# Allegro board 8MICS_V021.brd
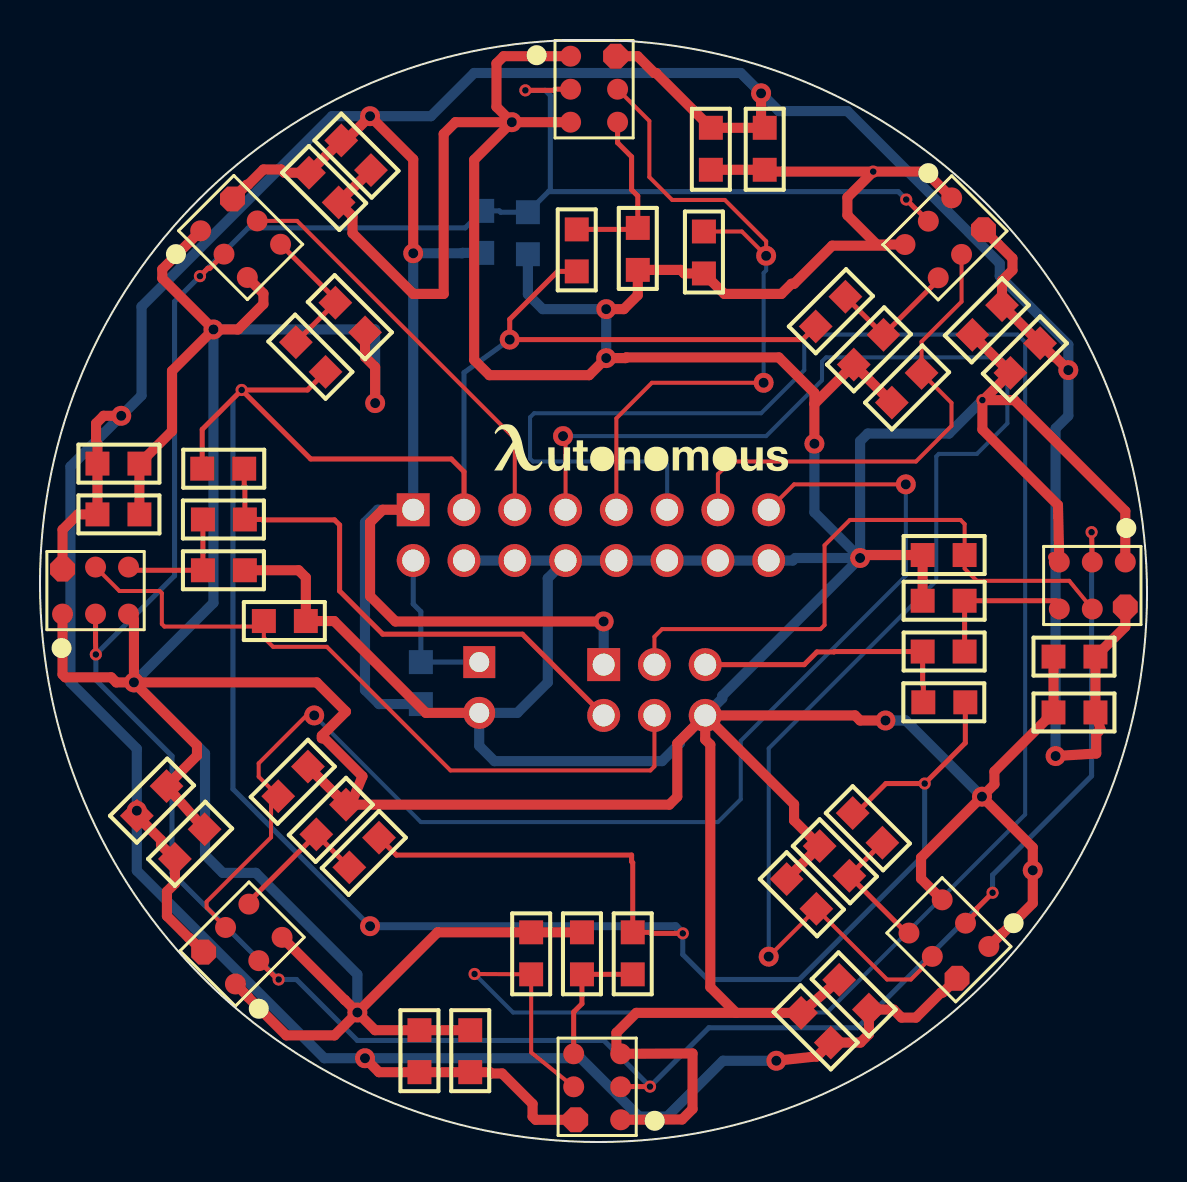
[diagram p0: board, top side]
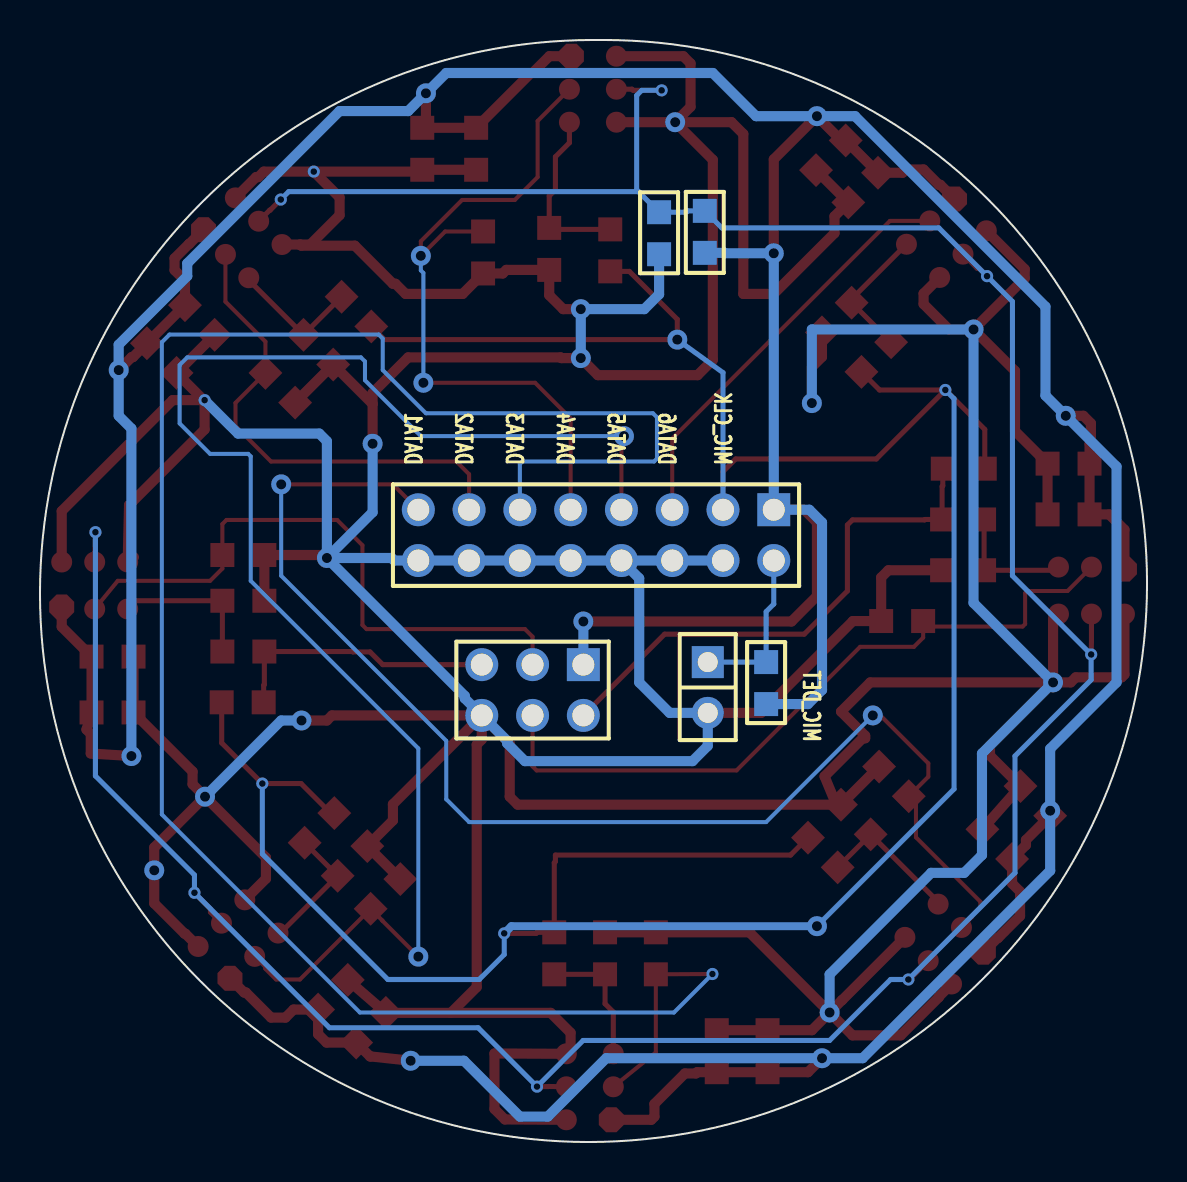
[diagram p1: board, bottom side, seen from below]

Outline 55.37 x 55.12 mm; copper layers: TOP, BOTTOM. Coordinates in mm from the lower left corner of the outline.
Outline path: 0,27.94 arc(7.96,47.16) 27.18,55.12 27.69,55.12 arc(47.26,47.01) 55.37,27.43 arc(47.34,8.03) 27.94,0 arc(8.18,8.18) 0,27.94

## Design rules (mm)
nets with their own width: min track width 0.203; nets MIC_DATA1 MIC_DATA2 MIC_DATA3 MIC_DATA4 MIC_DATA5 MIC_DATA6 MIC_DATA7 MIC_DATA8
nets with their own width: min track width 0.254; nets ARRAY_DET LR_SELECT MIC_CK MIC_CK7 MIC_CK8 MIC_CLK1 MIC_CLK2 MIC_CLK3 MIC_CLK4 MIC_CLK5 MIC_CLK6 MIC_CLK7 MIC_CLK8
nets with their own width: min track width 0.508; nets 3.3V GND

## Placement (name value [footprint] x y rotation side)
C1  10uF  [CAP_SMD_0805]  14.94 46.99 135 top
C2  100nF  [CAP_SMD_0805]  16.56 48.61 135 top
C4  15pF  [CAP_SMD_0805]  14.77 41.98 315 top
C5  15pF  [CAP_SMD_0805]  38.83 11.67 135 top
C6  15pF  [CAP_SMD_0805]  40.48 13.32 135 top
C7  10uF  [CAP_SMD_0805]  39.98 8.11 315 top
C8  100nF  [CAP_SMD_0805]  38.07 6.46 315 top
C9  15pF  [CAP_SMD_0805]  33.21 45.54 270 top
C10  15pF  [CAP_SMD_0805]  29.9 45.72 270 top
C11  10uF  [CAP_SMD_0805]  36.25 48.63 90 top
C12  100nF  [CAP_SMD_0805]  33.56 48.63 90 top
C13  15pF  [CAP_SMD_0805]  24.57 8.39 90 top
C14  15pF  [CAP_SMD_0805]  27.11 8.39 90 top
C15  10uF  [CAP_SMD_0805]  21.52 5.59 270 top
C16  100nF  [CAP_SMD_0805]  18.98 5.59 270 top
C17  15pF  [CAP_SMD_0805]  44.09 38.47 225 top
C18  15pF  [CAP_SMD_0805]  42.19 40.37 225 top
C19  10uF  [CAP_SMD_0805]  46.63 40.37 45 top
C20  100nF  [CAP_SMD_0805]  48.54 38.47 45 top
C21  15pF  [CAP_SMD_0805]  11.92 17.29 45 top
C22  15pF  [CAP_SMD_0805]  13.82 15.39 45 top
C23  10uF  [CAP_SMD_0805]  8.23 15.64 225 top
C24  100nF  [CAP_SMD_0805]  6.33 17.8 225 top
C25  15pF  [CAP_SMD_0805]  46.25 29.36 180 top
C26  15pF  [CAP_SMD_0805]  46.25 27.07 180 top
C27  10uF  [CAP_SMD_0805]  50.69 24.28 0 top
C28  100nF  [CAP_SMD_0805]  50.69 21.48 0 top
C29  15pF  [CAP_SMD_0805]  11.2 26.06 0 top
C30  15pF  [CAP_SMD_0805]  8.15 28.6 0 top
C31  10uF  [CAP_SMD_0805]  4.97 31.39 180 top
C32  100nF  [CAP_SMD_0805]  4.97 33.93 180 top
J1  IDC_16_2.54mm  [16PINDUALMALEHEADER]  18.67 31.62 0 bottom
J2  JUMPER1  [J1_2_254]  21.97 24 270 bottom
J3  ICD_6_2.54mm  [6PINDUALMALEHEADER]  28.19 23.88 0 bottom
NOREF  -  []  17.42 33.55 0 top
R1  100  [RES_SMD_0805]  12.8 40 315 top
R2  0  [RES_SMD_0805]  24.41 46.5 270 bottom
R3  10K  [RES_SMD_0805]  22.12 44.47 90 bottom
R4  100  [RES_SMD_0805]  42.14 14.97 135 top
R5  100  [RES_SMD_0805]  26.85 45.65 270 top
R6  100  [RES_SMD_0805]  29.65 8.39 90 top
R7  100  [RES_SMD_0805]  40.28 42.28 225 top
R8  100  [RES_SMD_0805]  15.47 13.74 45 top
R9  100  [RES_SMD_0805]  46.25 24.53 180 top
R10  100  [RES_SMD_0805]  8.15 31.14 0 top
R11  10K  [RES_SMD_0805]  19.05 24 270 bottom
R12  0  [RES_SMD_0805]  44.18 21.99 0 top
R13  0  [RES_SMD_0805]  10.22 33.68 180 top
U1  Micophone MP45DT02  [MP45DT02]  10.87 46.07 45 top
U2  Micophone MP45DT02  [MP45DT02]  44.63 9.28 225 top
U3  Micophone MP45DT02  [MP45DT02]  28.89 52.66 0 top
U4  Micophone MP45DT02  [MP45DT02]  26.7 2.76 180 top
U5  Micophone MP45DT02  [MP45DT02]  46.1 44.39 315 top
U6  Micophone MP45DT02  [MP45DT02]  9.28 10.73 135 top
U7  Micophone MP45DT02  [MP45DT02]  52.64 26.66 270 top
U8  Micophone MP45DT02  [MP45DT02]  2.78 28.76 90 top

## Library data of the parts
C1 C2 C4-C32 = CAPACITOR NON-POL
J1 = CON16AP_1
J2 = JUMPER1
J3 = CON6
R1-R13 = R
U1-U8 = Micophone MP45DT02_0

## Footprints (pads in the part's own frame, mm; a bottom-side part is the same pattern mirrored in y, then rotated)
6PINDUALMALEHEADER
  rect 1.65x1.65 hole 1.1: 1(0,0)
  round 1.65 hole 1.1: 2(0,2.54) 3(2.54,0) 4(2.54,2.54) 5(5.08,0) 6(5.08,2.54)
16PINDUALMALEHEADER
  rect 1.65x1.65 hole 1.1: 1(0,0)
  round 1.65 hole 1.1: 2(0,2.54) 3(2.54,0) 4(2.54,2.54) 5(5.08,0) 6(5.08,2.54) 7(7.62,0) 8(7.62,2.54) 9(10.16,0) 10(10.16,2.54) 11(12.7,0) 12(12.7,2.54) 13(15.24,0) 14(15.24,2.54) 15(17.78,0) 16(17.78,2.54)
CAP_SMD_0805
  rect 1.2x1.2 smd: 1(0,0) 2(2.1,0)
J1_2_254
  rect 1.6x1.6 hole 1: 1(0,0)
  round 1.6 hole 1: 2(2.54,0)
MP45DT02
  round 1.05 smd: 1(-2.35,1.65) 2(-2.35,0) 3(-2.35,-1.65) 4(0,-1.65) 5(0,0)
  rrect 1.25x1.25 smd: 6(-0.1,1.65)
RES_SMD_0805
  rect 1.2x1.2 smd: 1(0,0) 2(2.1,0)

## Nets
3.3V: C1.2 C2.2 C7.2 C8.2 C11.2 C12.2 C15.2 C16.2 C19.2 C20.2 C23.2 C24.2 C27.2 C28.2 C31.2 C32.2 J1.1 J3.1 R3.1 R11.2 U1.6(3V3) U2.6(3V3) U3.6(3V3) U4.6(3V3) U5.6(3V3) U6.6(3V3) U7.6(3V3) U8.6(3V3)
GND: C1.1 C2.1 C4.2 C5.2 C6.2 C7.1 C8.1 C9.2 C10.2 C11.1 C12.1 C13.2 C14.2 C15.1 C16.1 C17.2 C18.2 C19.1 C20.1 C21.2 C22.2 C23.1 C24.1 C25.2 C26.2 C27.1 C28.1 C29.2 C30.2 C31.1 C32.1 J1.4 J1.6 J1.8 J1.10 J1.12 J1.14 J1.16 J2.2 J3.6 R2.2 U1.1(GND) U1.3(GND1) U2.1(GND) U2.3(GND1) U3.1(GND) U3.3(GND1) U4.1(GND) U4.3(GND1) U5.1(GND) U5.3(GND1) U6.1(GND) U6.3(GND1) U7.1(GND) U7.3(GND1) U8.1(GND) U8.3(GND1)
ARRAY_DET: J1.2 J2.1 R11.1
LR_SELECT: R2.1 R3.2 U1.2(LR) U2.2(LR) U3.2(LR) U4.2(LR) U5.2(LR) U6.2(LR) U7.2(LR) U8.2(LR)
MIC_CK: J1.3 R1.2 R4.2 R5.2 R6.2 R7.2 R8.2 R12.2 R13.2
MIC_CK7: J3.5 R9.2 R12.1
MIC_CK8: J3.2 R10.2 R13.1
MIC_CLK1: C4.1 R1.1 U1.4(CLK)
MIC_CLK2: C6.1 R4.1 U2.4(CLK)
MIC_CLK3: C10.1 R5.1 U3.4(CLK)
MIC_CLK4: C14.1 R6.1 U4.4(CLK)
MIC_CLK5: C18.1 R7.1 U5.4(CLK)
MIC_CLK6: C22.1 R8.1 U6.4(CLK)
MIC_CLK7: C26.1 R9.1 U7.4(CLK)
MIC_CLK8: C30.1 R10.1 U8.4(CLK)
MIC_DATA1: J1.5 U1.5(DOUT)
MIC_DATA2: C5.1 J1.7 U2.5(DOUT)
MIC_DATA3: C9.1 J1.9 U3.5(DOUT)
MIC_DATA4: C13.1 J1.11 U4.5(DOUT)
MIC_DATA5: C17.1 J1.13 U5.5(DOUT)
MIC_DATA6: C21.1 J1.15 U6.5(DOUT)
MIC_DATA7: C25.1 J3.3 U7.5(DOUT)
MIC_DATA8: C29.1 J3.4 U8.5(DOUT)

## Via types
v1: diameter 1, hole 0.5, TOP to BOTTOM, 30 vias
v2: diameter 0.61, hole 0.33, TOP to BOTTOM, 14 vias

## Routing (per net, layer and track width the routed paths; a pad name or vN(x,y) marks a point on that pad's centre or on a via; arc(x,y) is an arc through that point)
3.3V: length 287.3
  TOP w0.508: v1(36.83,4.06) 38.82,4.28 38.86,4.28 C8.2 41.04,4.97 41.46,5.4 C7.2 42.69,6.62 43.09,6.22 43.82,6.22 45.07,7.48 45.16,7.48 U2.6 ; J1.1 17.15,31.62 16.51,30.99 16.51,27.3 17.78,26.03 v1(28.19,26.03) ; U1.6 10.34,47.88 10.41,47.88 11.18,48.64 12.06,48.64 12.22,48.48 C1.2 C2.2 15.3,50.09 v1(16.51,51.31) 18.67,49.15 v1(18.67,44.45) ; U4.6 24.8,1.11 24.64,1.27 24.64,1.91 23.11,3.43 22.56,3.43 22.5,3.49 C15.2 C16.2 16.95,3.49 v1(16.26,4.19) ; v1(4.06,36.32) 3.18,36.32 2.81,35.95 2.81,34.98 2.87,34.91 C32.2 C31.2 1.89,31.39 1.13,30.63 U8.6 ; U6.6 7.47,10.21 7.45,10.21 6.35,11.3 6.35,12.53 6.75,12.93 C23.2 6.06,14.85 6.06,15.1 C24.2 ; U3.6 29.89,54.31 30.73,53.47 30.82,53.47 C12.2 C11.2 36.07,50.91 v1(36.07,52.45) ; v1(51.44,38.61) 50.79,39.26 50.72,39.26 C20.2 C19.2 48.12,43.09 48.64,43.61 48.64,44.2 47.92,44.92 47.9,44.92 U5.6 ; U7.6 54.29,25.77 C27.2 C28.2 53.05,20.63 52.83,20.41 52.83,19.43 v1(50.8,19.3)
  BOTTOM w0.508: v1(36.83,4.06) 34.16,4.06 31.37,1.27 29.97,1.27 27.05,4.19 v1(16.26,4.19) 14.22,4.19 4.84,13.57 v1(4.84,16.57) 4.84,19.67 1.52,22.99 1.52,33.78 v1(4.06,36.32) 5.08,37.34 5.08,41.78 14.61,51.31 v1(16.51,51.31) 19.56,51.31 21.72,53.47 35.05,53.47 v1(36.07,52.45) 36.96,51.56 40.39,51.56 48.01,43.94 48.01,43.31 51.44,39.88 v1(51.44,38.61) 51.44,36.32 50.8,35.69 v1(50.8,19.3) ; v1(28.19,26.03) J3.1 ; R3.1 21.14,44.47 21.12,44.45 v1(18.67,44.45) J1.1 16.89,31.62 16.26,30.99 16.26,22.61 16.96,21.9 R11.2
GND: length 502.5
  TOP w0.508: 34.82,6.46 29.83,6.46 28.83,5.46 28.83,4.62 U4.3 32.64,4.43 32.64,1.65 32.12,1.13 U4.1 ; 34.82,6.46 C8.1 C7.1 ; 34.82,6.46 33.53,7.75 33.53,19.88 33.27,20.13 J3.6 ; v1(15.88,6.48) 14.73,5.33 12.32,5.33 10.42,7.24 10.42,7.26 U6.1 ; v1(15.88,6.48) 16.76,5.59 C16.1 C15.1 ; v1(15.88,6.48) 19.88,10.49 C13.2 C14.2 ; v1(15.88,6.48) 15.25,7.1 15.25,7.1 U6.3 ; C19.1 C20.1 47.18,37.11 ; 10.37,43.24 11.18,42.44 11.18,41.91 9.91,40.64 v1(8.68,40.64) ; C22.2 15.59,16.99 16.13,18.29 14.22,20.19 14.1,20.19 14.1,20.32 15.3,21.53 13.84,22.99 v1(4.7,22.99) ; C22.2 31.48,16.87 31.88,17.27 31.88,19.94 J3.6 ; C22.2 C21.2 ; U1.1 6.12,43.65 6.12,43.2 v1(8.68,40.64) ; v2(41.68,48.54) 40.39,47.24 40.39,46.35 41.85,44.89 42.36,44.89 ; v2(41.68,48.54) 36.34,48.54 C11.1 C12.1 ; v2(41.68,48.54) 44.17,48.54 44.45,48.26 44.56,48.26 U5.1 ; 47.18,37.11 48.74,37.11 54.29,31.55 U7.1 ; 47.18,37.11 v2(47.14,37.11) 47.14,35.64 50.92,31.86 U7.3 50.67,29.25 ; v1(23.6,51.01) 22.83,51.77 22.83,53.95 23.19,54.31 U3.1 ; v1(23.6,51.01) 21.72,49.12 21.72,39.12 22.48,38.35 27.47,38.35 v1(28.32,39.21) 29.29,39.21 29.33,39.24 36.96,39.24 38.74,37.46 38.74,36.92 ; v1(23.6,51.01) 20.78,51.01 20.19,50.42 20.19,42.42 18.67,42.42 15.63,45.45 15.63,46.3 C1.1 C2.1 ; v1(23.6,51.01) U3.3 ; C27.1 C28.1 47.74,18.53 47.74,17.89 v1(47.12,17.27) ; v1(47.12,17.27) 49.66,14.73 v1(49.66,13.59) 49.66,11.94 48.14,10.42 48.1,10.42 U2.1 ; v1(47.12,17.27) 44.07,14.22 44.07,13.17 U2.3 ; v1(41.02,29.21) 41.17,29.36 C25.2 C26.2 ; J3.6 37.72,16.89 37.72,16.08 C6.2 C5.2 ; J3.6 40.77,21.34 41.02,21.08 v1(42.29,21.08) ; 42.36,44.89 U5.3 ; 42.36,44.89 42.3,44.83 39.62,44.83 37.72,42.93 37.59,42.93 37.08,42.42 34.23,42.42 C9.2 32.23,43.44 32.05,43.62 C10.2 29.9,42.36 29.2,41.66 v1(28.32,41.66) ; v1(16.76,36.96) 16.76,38.76 16.26,39.26 C4.2 ; C17.2 C18.2 38.74,36.92 ; v1(4.7,22.99) 7.85,19.83 7.85,19.33 C24.1 C23.1 ; v1(4.7,22.99) 4.7,26.13 U8.3 ; v1(4.7,22.99) 3.82,22.99 3.56,23.24 1.27,23.24 1.13,23.38 U8.1 ; v1(8.68,40.64) 6.6,38.57 6.6,35.56 C32.1 C31.1 ; 38.74,36.92 v1(38.74,34.92) ; J2.2 19.3,21.46 14.71,26.06 C29.2 13.3,28.24 12.94,28.6 C30.2
  BOTTOM w0.508: J1.8 J1.10 J1.12 J1.14 J1.16 37.66,29.08 37.78,29.21 v1(41.02,29.21) ; J1.8 25.4,28.19 25.4,22.99 23.88,21.46 J2.2 21.97,19.81 22.73,19.05 31.12,19.05 32,19.94 32,20.07 J3.6 34.13,22.19 34.13,22.32 v1(41.02,29.21) ; J1.8 J1.6 J1.4 ; v1(15.88,6.48) 15.88,8.38 10.8,13.46 9.14,13.46 8.26,14.35 8.26,19.43 v1(4.7,22.99) ; v1(47.12,17.27) 43.31,21.08 v1(42.29,21.08) ; v1(4.7,22.99) 8.68,26.96 v1(8.68,40.64) 16.76,40.64 v1(16.76,36.96) ; v1(4.7,22.99) 4.57,22.99 ; v1(41.02,29.21) 38.74,31.5 v1(38.74,34.92) ; v1(41.02,29.21) 41.02,35.05 41.4,35.43 45.47,35.43 v2(47.14,37.11) ; v1(28.32,39.21) v1(28.32,41.66) 25.15,41.66 24.41,42.4 R2.2
ARRAY_DET: length 8.2
  BOTTOM w0.254: J2.1 R11.1 19.05,26.53 18.67,26.91 J1.2
LR_SELECT: length 160.6
  TOP w0.254: v2(8,43.31) 8.4,43.7 8.5,43.7 U1.2 ; U4.2 29.95,2.78 29.95,2.77 v2(30.51,2.77) ; v2(11.94,8.13) 11.88,8.13 U6.2 ; U2.2 46.85,11.5 46.85,11.67 v2(47.65,12.47) ; v2(2.79,24.38) 2.78,25.03 U8.2 ; v2(24.28,52.6) 25.7,52.6 25.76,52.66 U3.2 ; U5.2 43.88,46.61 43.86,46.61 v2(43.33,47.14) ; U7.2 v2(52.6,30.5)
  BOTTOM w0.254: v2(52.6,30.5) 52.6,18.31 47.65,13.36 v2(47.65,12.47) 40.89,5.71 33.46,5.71 v2(30.51,2.77) 28.2,5.08 15.88,5.08 12.83,8.13 v2(11.94,8.13) 6.6,13.46 6.6,19.3 2.79,23.11 v2(2.79,24.38) 6.73,28.32 6.73,42.04 v2(8,43.31) 10.41,45.72 21.27,45.72 R3.2 22.97,46.57 23.04,46.5 R2.1 25.44,47.53 ; 25.44,47.53 42.93,47.53 v2(43.33,47.14) ; 25.44,47.53 25.53,47.62 25.53,52.34 25.27,52.6 v2(24.28,52.6)
MIC_CK: length 149.2
  TOP w0.254: v2(10.09,37.61) 13.38,37.61 R1.2 ; v2(10.09,37.61) 8.12,35.64 R13.2 8.26,33.82 8.26,34.09 8.33,34.16 ; v2(10.09,37.61) 13.54,34.16 20.57,34.16 21.21,33.53 J1.3 ; R4.2 40.84,16.45 42.31,17.93 v2(44.25,17.93) 46.28,19.96 R12.2 ; R7.2 38.14,40.13 v1(23.5,40.13) 23.5,41.15 25.89,43.55 R5.2 ; v2(32.15,10.44) 30.55,10.44 30.5,10.49 R6.2 29.65,13.97 29.59,14.03 29.59,14.35 17.83,14.35 R8.2
  BOTTOM w0.254: J1.3 21.21,38.48 v1(23.5,40.13) ; v2(44.25,17.93) 44.25,14.41 37.97,8.13 33.4,8.13 32.15,9.38 v2(32.15,10.44) ; v1(16.51,10.79) 9.65,17.65 9.65,37.18 v2(10.09,37.61)
  BOTTOM w0.4: v1(16.51,10.79) 31.79,10.79 v2(32.15,10.44)
MIC_CK7: length 13.7
  TOP w0.254: J3.5 38.23,23.88 38.86,24.51 39.72,24.51 39.74,24.53 R9.2 44.15,22.88 44.18,22.85 R12.1
MIC_CK8: length 26.5
  TOP w0.254: R13.1 10.22,32.82 10.25,32.79 R10.2 11.1,31.14 11.12,31.12 14.73,31.12 14.99,30.86 14.99,27.56 17.15,25.4 24.13,25.4 J3.2
MIC_CLK1: length 6.9
  TOP w0.254: R1.1 C4.1 14.77,42.16 U1.4
MIC_CLK2: length 6.5
  TOP w0.254: R4.1 C6.1 43.35,10.45 U2.4
MIC_CLK3: length 8.8
  TOP w0.254: U3.4 28.89,49.98 29.59,49.28 29.59,47.62 29.9,47.31 C10.1 29.83,45.65 R5.1
MIC_CLK4: length 6.7
  TOP w0.254: R6.1 C14.1 27.11,6.92 26.7,6.5 U4.4
MIC_CLK5: length 6.7
  TOP w0.254: U5.4 44.93,43.11 C18.1 R7.1
MIC_CLK6: length 7.2
  TOP w0.254: R8.1 C22.1 10.45,12.01 U6.4
MIC_CLK7: length 7.6
  TOP w0.254: R9.1 C26.1 50.82,27.07 U7.4
MIC_CLK8: length 6.3
  TOP w0.254: U8.4 4.59,28.6 C30.1 R10.1
MIC_DATA1: length 20.9
  TOP w0.203: J1.5 23.75,35.18 12.86,46.07 U1.5
MIC_DATA2: length 75.1
  TOP w0.203: v1(26.16,35.31) 26.29,35.18 J1.7 ; v1(36.45,9.27) 38.25,11.07 38.25,11.08 C5.1 42.37,8.13 43.56,8.13 44.1,8.67 44.1,8.75 U2.5
  BOTTOM w0.203: v1(26.16,35.31) 36.32,35.31 39.12,38.1 39.12,39.04 39.32,39.24 48.01,39.24 48.39,38.86 48.39,35.94 46.86,34.42 44.96,34.42 44.83,34.29 44.83,28.07 36.45,19.69 v1(36.45,9.27)
MIC_DATA3: length 35.6
  TOP w0.203: v1(36.2,37.97) 30.61,37.97 28.83,36.2 J1.9 ; C9.1 35.11,45.54 v1(36.32,44.32) 36.32,45.05 34.26,47.12 31.62,47.12 30.48,48.26 30.48,51.07 U3.5
  BOTTOM w0.203: v1(36.32,44.32) 36.32,43.59 36.2,43.47 v1(36.2,37.97)
MIC_DATA4: length 104.4
  TOP w0.203: U4.5 24.57,4.48 C13.1 v2(21.74,8.4)
  BOTTOM w0.203: v2(21.74,8.4) 23.66,6.48 39.37,6.48 49.28,16.38 49.28,40 48.9,40.39 38.43,40.39 38.23,40.18 38.23,38.61 36.07,36.45 24.71,36.45 24.51,36.25 24.51,34.18 24.65,34.04 31.24,34.04 31.37,33.91 J1.11
MIC_DATA5: length 24.5
  TOP w0.203: U5.5 46.1,42.03 44.09,40.03 C17.1 45.59,36.97 45.59,35.81 43.82,34.04 34.54,34.04 33.91,33.4 J1.13
MIC_DATA6: length 64.8
  TOP w0.203: U6.5 8.75,11.26 8.75,11.32 8.34,11.73 8.34,12.02 11.56,15.24 11.56,16.93 C21.1 10.94,18.27 10.94,18.94 13.34,21.34 v1(13.72,21.34) ; J1.15 37.72,32.89 v1(43.31,32.89)
  BOTTOM w0.203: v1(13.72,21.34) 19.05,16 33.91,16 35.05,17.14 35.05,20.07 43.31,28.32 v1(43.31,32.89)
MIC_DATA7: length 31.3
  TOP w0.203: U7.5 51.48,28.07 46.86,28.07 46.25,28.68 C25.1 46.25,30.91 46.05,31.11 40.51,31.11 39.24,29.84 39.24,25.86 39.04,25.65 31.12,25.65 30.73,25.27 J3.3
MIC_DATA8: length 36.5
  TOP w0.203: J3.4 30.73,18.79 30.53,18.58 20.53,18.58 14.35,24.77 11.66,24.77 11.2,25.23 C29.1 11.18,26.03 11.18,25.91 11.05,25.78 6.22,25.78 6.1,25.91 6.1,27.45 5.99,27.56 3.97,27.56 U8.5

## Text on the board
Ref Des/Silkscreen Bottom: MIC_DET | MIC_CLK | DATA6 | DATA5 | DATA4 | DATA3 | DATA2 | DATA1
PLACE_BOUND_BOTTOM: FIGURE | SIZE | 13.0 | 39.37 | 43.31 | DRILL CHART: TOP to BOTTOM | ALL UNITS ARE IN MILS | PLATED | QTY | 26 | 2 | 22
